# Altium PCB Master.PcbDoc
Units mm, origin at the board's own origin, x right, y up, seen from the top; angles counter-clockwise.
Board outline 105.41 x 114.81 mm, 2 copper layers (Top Layer, Bottom Layer); 24 components, 97 nets, 218 pads, 8 vias.
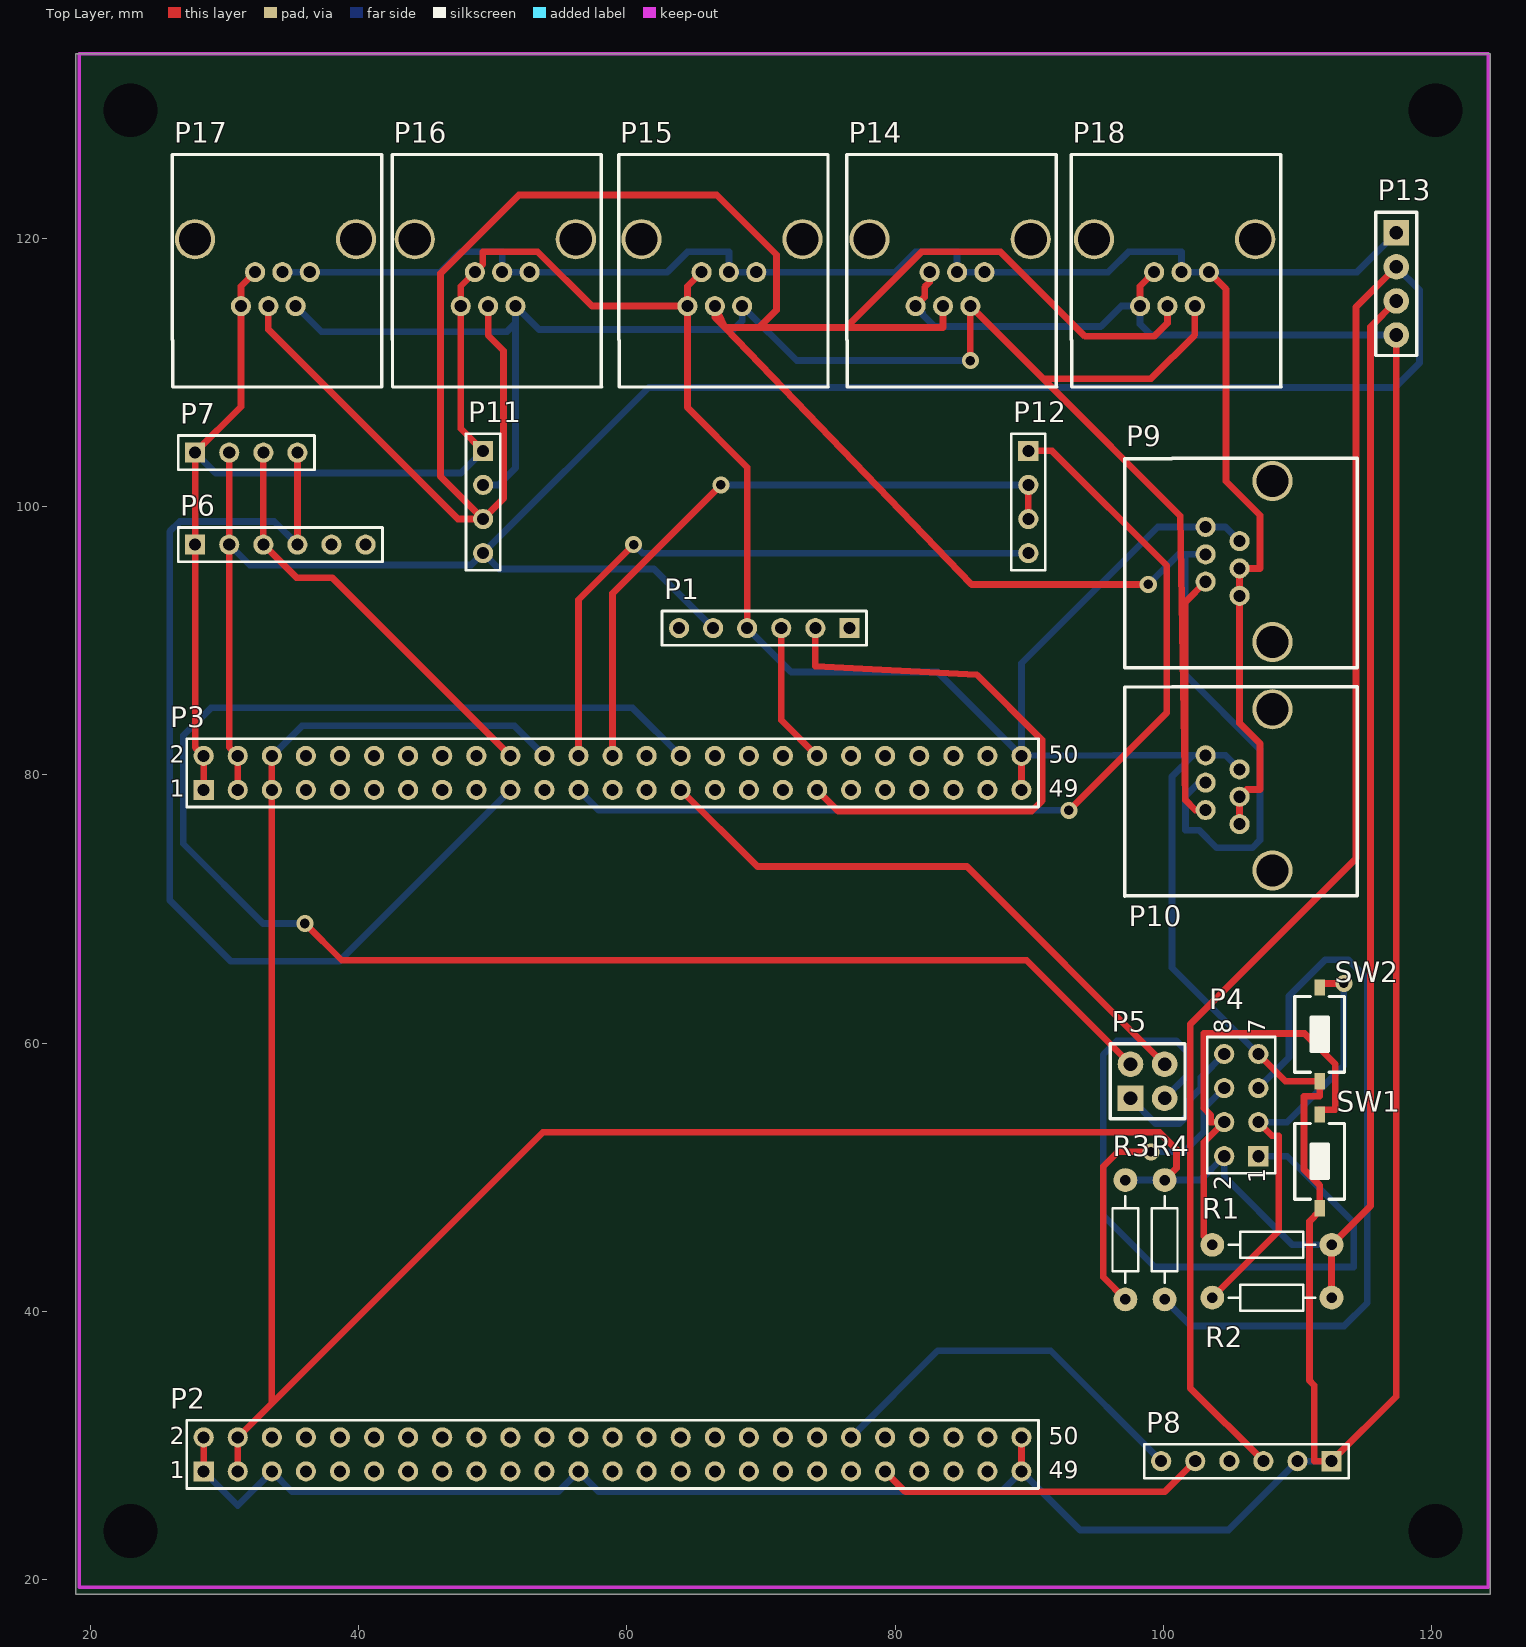
[diagram p0: Top Layer view]
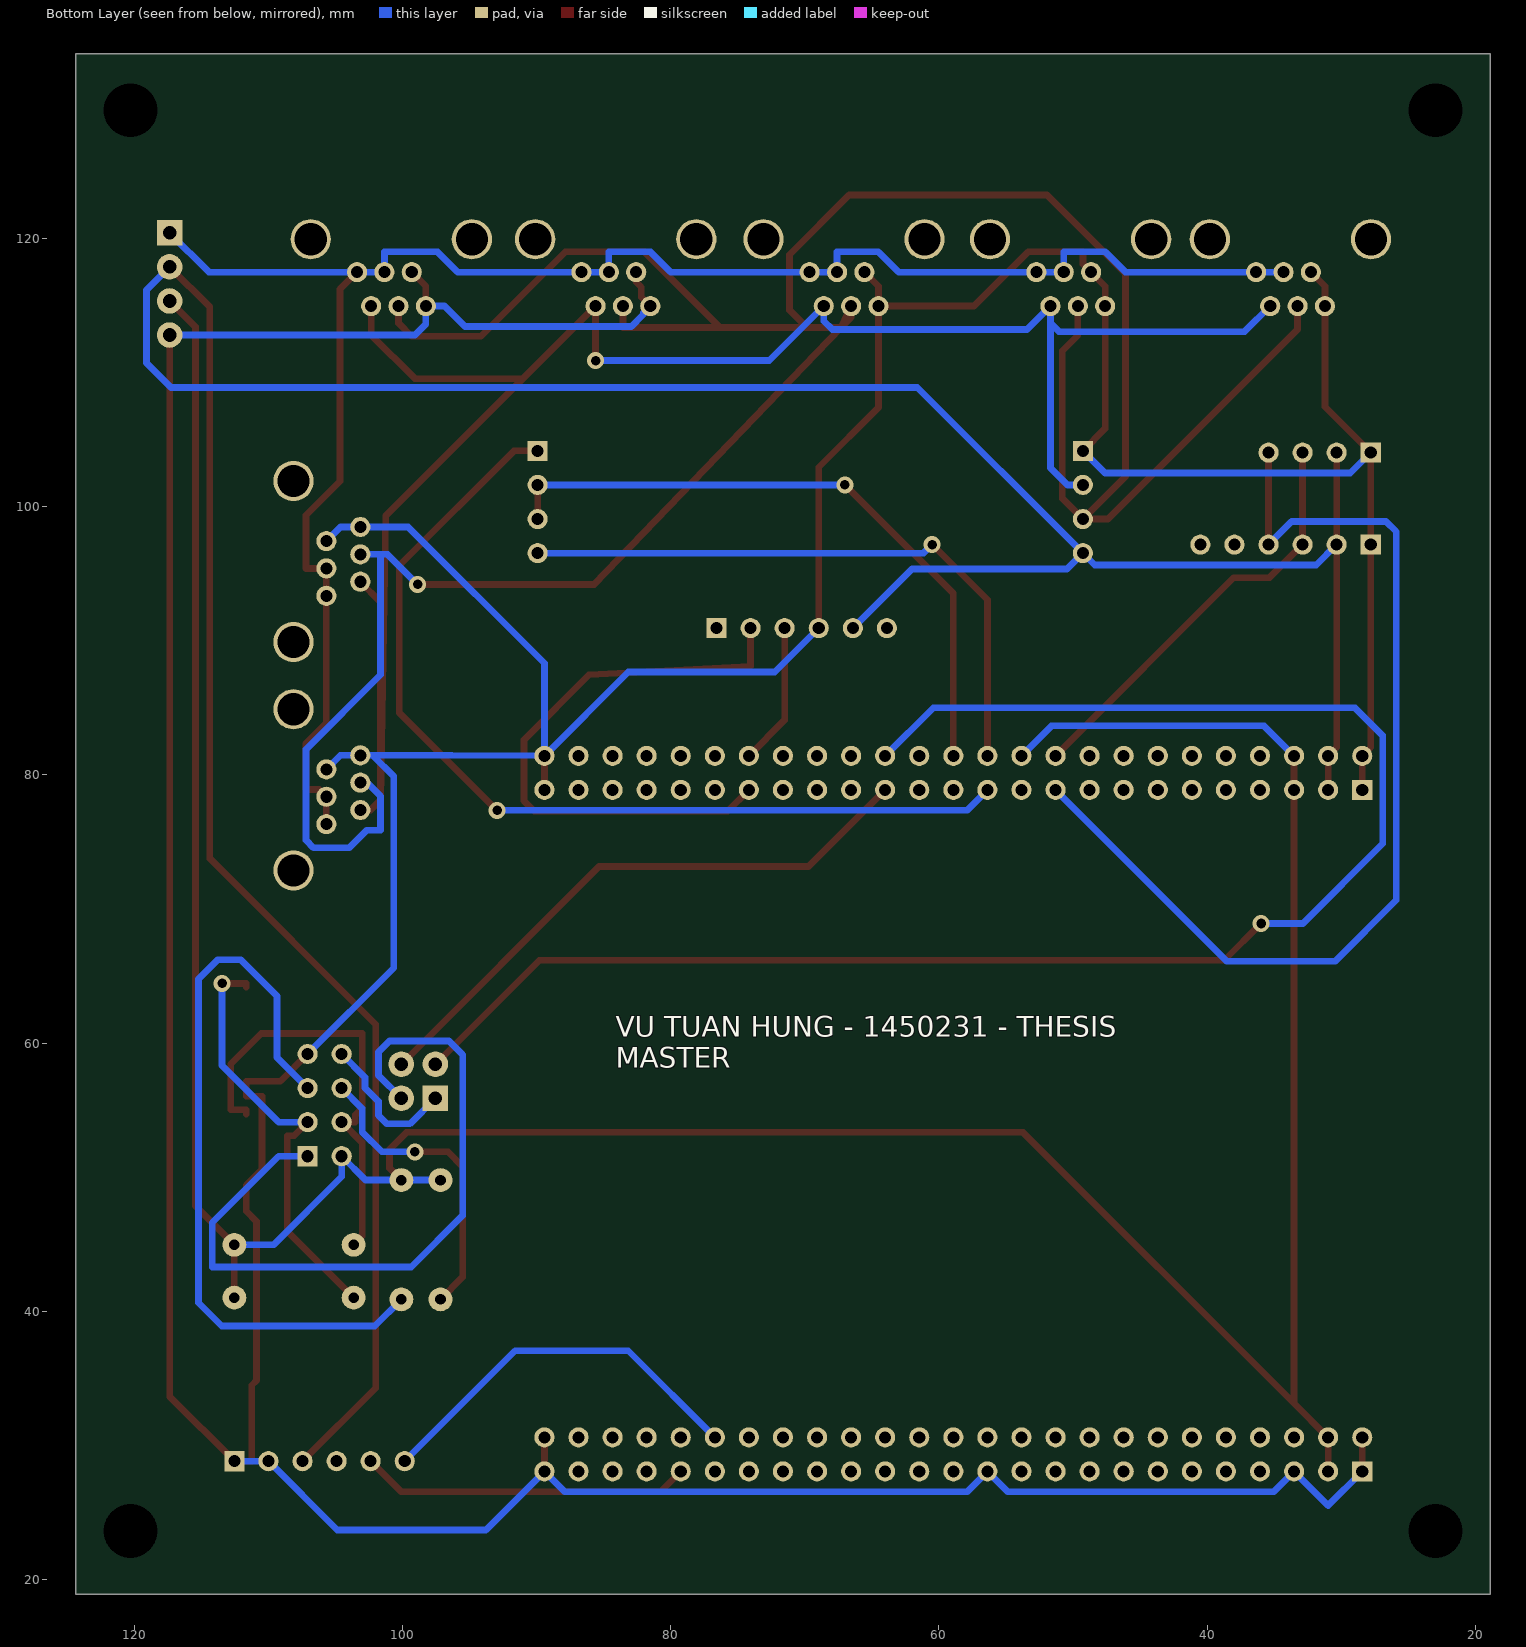
[diagram p1: Bottom Layer view, seen from below]
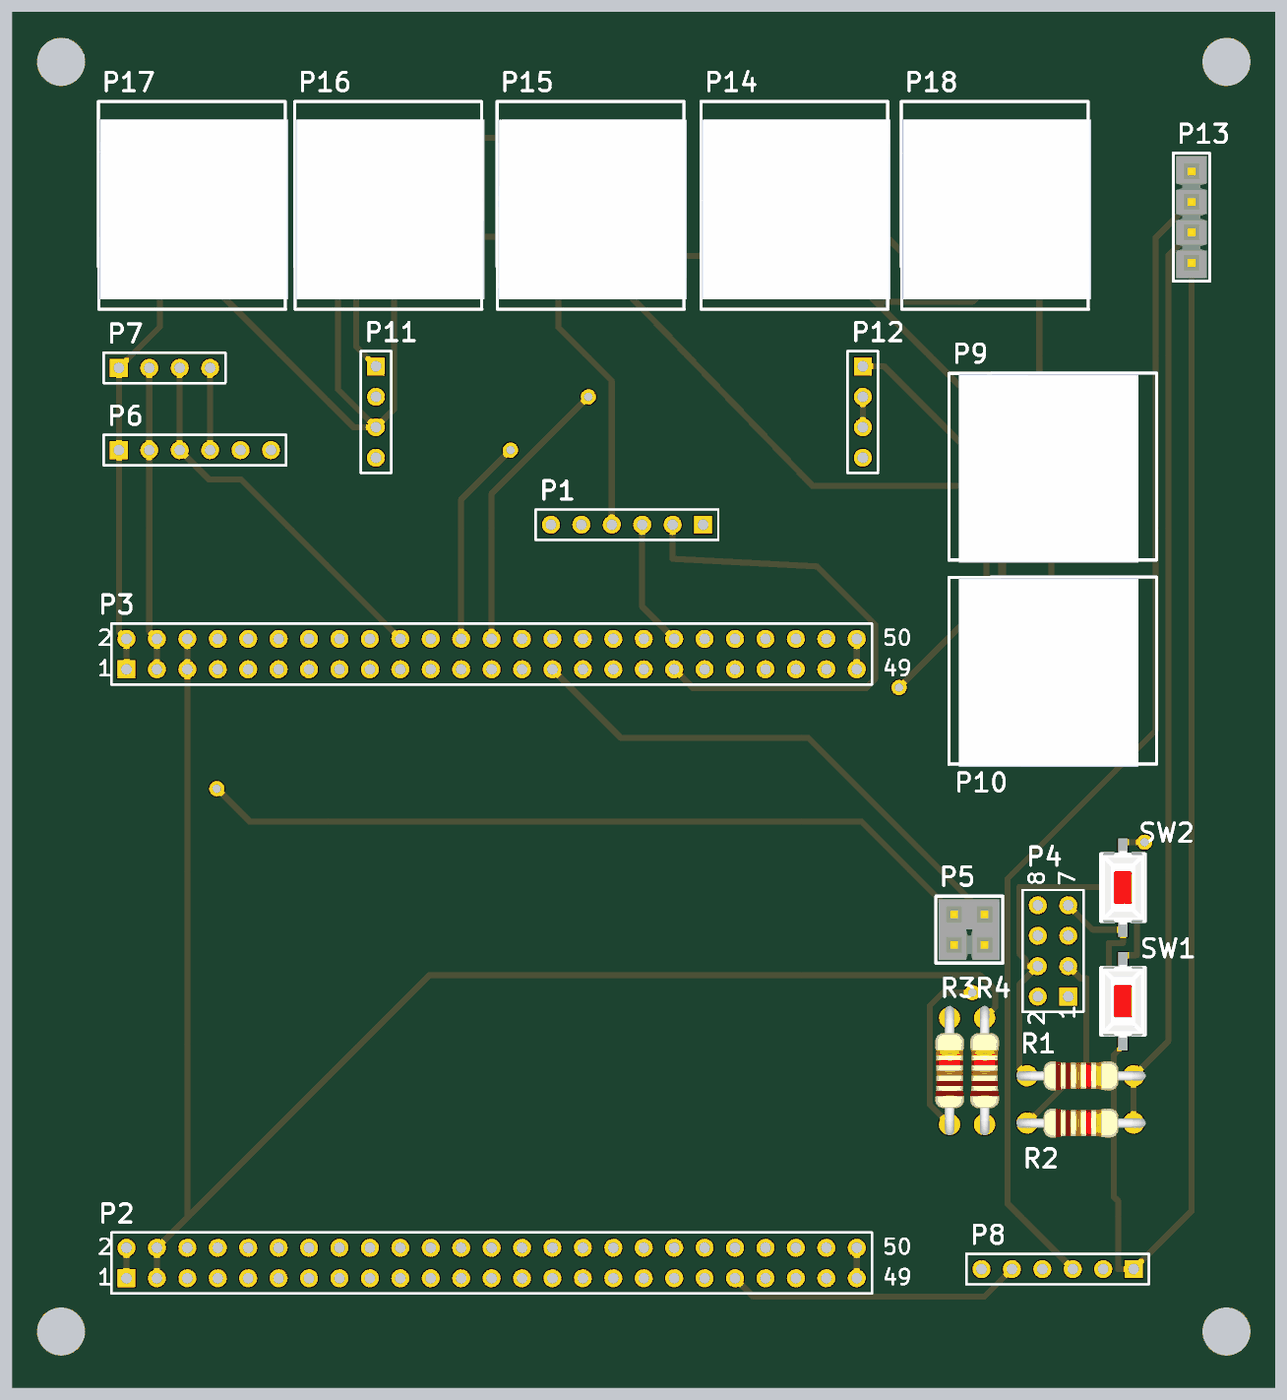
[diagram p2: 3D render of the assembled board from above, using the file's embedded part models]

## Layer stack, top to bottom
Top Solder: solder mask 0.0102, Solder Resist, Dk 3.5
Top Layer: signal copper 0.0356
Dielectric 1: dielectric 0.32, FR-4, Dk 4.8
Bottom Layer: signal copper 0.0356
Bottom Solder: solder mask 0.0102, Solder Resist, Dk 3.5

## Board outline
18.923,18.923 124.333,18.923 124.333,133.731 18.923,133.731

## Design rules (kind name [scope] priority, off if disabled: settings)
Clearance [All] p1: gap=0.5 ignorepadtopadclearanceinfootprint=FALSE
PolygonConnect [All] p1: connectstyle=Relief reliefconductorwidth=0.5 reliefentries=4 polygonreliefangle="90 Angle" airgapwidth=0.5
RoutingVias [All] p1: holewidth=0.711 width=1.27 viastyle="Through Hole" minholewidth=0.711 minwidth=1.27 maxholewidth=0.711 maxwidth=1.27
SolderMaskExpansion [All] p1: expansion=0.102
Width [All] p1: maxlimit=2 minlimit=0.3 preferedwidth=0.5
30 further rules are at their usual default settings.

## Components (designator, comment, footprint, x,y, rotation, side; value= is the part's Value field where it differs from the comment)
P1 "Header 6" HDR1X6 76.581,90.932 r180 top
P2 "Header 25X2" HDR2X25 28.448,28.067 r0 top
P3 "Header 25X2" HDR2X25 28.448,78.867 r0 top
P4 "Header 4X2" HDR2X4 107.061,51.562 r90 top
P5 "Header 2x2" "Header 2x2" 97.536,55.88 r0 top
P6 "Header 6" HDR1X6 27.813,97.155 r0 top
P7 "Header 4" HDR1X4 27.813,104.013 r0 top
P8 "Header 6" HDR1X6 112.522,28.829 r180 top
P9 "Header 8" RJ11 103.134,94.387 r90 top
P10 "Header 8" RJ11 103.134,77.369 r90 top
P11 "Header 4" HDR1X4 49.276,104.14 r270 top
P12 "Header 4" HDR1X4 89.916,104.14 r270 top
P13 "Header 4" "Header 4" 117.348,120.396 r270 top
P14 "Header 8" RJ11 85.598,114.935 r180 top
P15 "Header 8" RJ11 68.588,114.935 r180 top
P16 "Header 8" RJ11 51.689,114.935 r180 top
P17 "Header 8" RJ11 35.306,114.935 r180 top
P18 "Header 8" RJ11 102.328,114.935 r180 top
R1 "RES_SMD_0805" R1/4W 112.522,44.958 r180 top value=10k
R2 "RES_SMD_0805" R1/4W 112.522,41.021 r180 top value=10k
R3 "RES_SMD_0805" R1/4W 97.155,49.784 r270 top value=10k
R4 "RES_SMD_0805" R1/4W 100.076,49.784 r270 top value=10k
SW1 "SW" SW-SMD 111.633,51.181 r270 top value="SW chip 2 pin"
SW2 "SW" SW-SMD 111.633,60.65 r270 top value="SW chip 2 pin"

## Footprints (in the part's own frame and the unit in brackets; to place one, negate y for a bottom-side part, rotate by r counter-clockwise, add the part's x,y. Pads: shape width x height; smd on the part's side, far side on the other; paste and mask are expansions set on the pad)
HDR1X4 [mm] "Connector; Header; 4 Position"
  rect 1.5x1.5 hole 0.9: 1(0,0)
  round 1.5 hole 0.9: 2(2.54,0) 3(5.08,0) 4(7.62,0)
  silkscreen extent -1.27,-1.27 8.89,1.27
HDR1X6 [mm] "Connector; Header; 6 Position"
  rect 1.5x1.5 hole 0.9: 1(0,0)
  round 1.5 hole 0.9: 2(2.54,0) 3(5.08,0) 4(7.62,0) 5(10.16,0) 6(12.7,0)
  silkscreen extent -1.27,-1.27 13.97,1.27
HDR2X4 [mm] "Connector; Header; 4x2 Position"
  rect 1.5x1.5 hole 0.9: 1(0,0)
  round 1.5 hole 0.9: 2(0,2.54) 3(2.54,0) 4(2.54,2.54) 5(5.08,0) 6(5.08,2.54) 7(7.62,0) 8(7.62,2.54)
  silkscreen extent -1.27,-1.27 8.89,3.81
HDR2X25 [mm] "Connector; Header; 25x2 Position"
  rect 1.5x1.5 hole 0.9: 1(0,0)
  round 1.5 hole 0.9: 2(0,2.54) 3(2.54,0) 4(2.54,2.54) 5(5.08,0) 6(5.08,2.54) 7(7.62,0) 8(7.62,2.54) 9(10.16,0) 10(10.16,2.54) 11(12.7,0) 12(12.7,2.54) 13(15.24,0) 14(15.24,2.54) 15(17.78,0) 16(17.78,2.54) 17(20.32,0) 18(20.32,2.54) 19(22.86,0) 20(22.86,2.54) 21(25.4,0) 22(25.4,2.54) 23(27.94,0) 24(27.94,2.54) 25(30.48,0) 26(30.48,2.54) 27(33.02,0) 28(33.02,2.54) 29(35.56,0) 30(35.56,2.54) 31(38.1,0) 32(38.1,2.54) 33(40.64,0) 34(40.64,2.54) 35(43.18,0) 36(43.18,2.54) 37(45.72,0) 38(45.72,2.54) 39(48.26,0) 40(48.26,2.54) 41(50.8,0) 42(50.8,2.54) 43(53.34,0) 44(53.34,2.54) 45(55.88,0) 46(55.88,2.54) 47(58.42,0) 48(58.42,2.54) 49(60.96,0) 50(60.96,2.54)
  silkscreen extent -1.27,-1.27 62.23,3.81
"Header 2x2" [mil] "Connector; Header; 4 Position; 2 Row; Solder Pad 35mil"
  rect 75x75 hole 40: 1(0,0)
  round 75 hole 40: 2(0,100) 3(100,0) 4(100,100)
  silkscreen extent -60,-60 160,160, body extent -50,-50 150,150, height 330
"Header 4" [mil] "Connector; Header; 4 Position; Solder Pad 35mil"
  rect 75x75 hole 40: 1(0,0)
  round 75 hole 40: 2(100,0) 3(200,0) 4(300,0)
  silkscreen extent -60,-60 360,60, body extent -50,-50 350,50, height 330
R1/4W [mil] "R 1/4W, 2 Pin, 350mil"
  round 70 hole 31: 1(0,0) 2(350,0)
  silkscreen extent 48,-38 302,38, body extent -40,-47 386,47, height 111
RJ11 [mm] "DIP 20, 20 PIN, W 300mil, Pin to pin 100mil"
  round 1.5 hole 0.9: 1(0,0) 2(2.04,0) 3(4.08,0) 4(-1.05,-2.53) 5(0.99,-2.53) 6(3.03,-2.53)
  round 3 hole 2.4: 7(-4.5,-4.98) 8(7.51,-4.98)
  silkscreen extent -6.43,-11.3 9.2,6.03, body extent -6.71,-9.8 9.11,5.19, height 12.87
SW-SMD [mm] "Switch SMD type"
  rect 1.2x0.8 smd: 1(-3.5,0) 2(3.5,0)
  silkscreen extent -2.82,-1.85 2.82,1.85, body extent -3.05,-1.85 3.05,1.85, height 2.5

## Part data
P1 P6 P8: "Header, 6-Pin", LatestRevisionDate=17-Jul-2002, LatestRevisionNote="Re-released for DXP Platform.", Publisher="Altium Limited"
P2 P3: "Header, 25-Pin, Dual row", LatestRevisionDate=17-Jul-2002, LatestRevisionNote="Re-released for DXP Platform.", Publisher="Altium Limited"
P4: "Header, 4-Pin, Dual row", LatestRevisionDate=17-Jul-2002, LatestRevisionNote="Re-released for DXP Platform.", Publisher="Altium Limited"
P5: "Header, 4-Pin, 2-Row", LatestRevisionDate=17-Jul-2002, LatestRevisionNote="Re-released for DXP Platform.", Publisher="Altium Limited"
P7 P11 P12 P13: "Header, 4-Pin", LatestRevisionDate=17-Jul-2002, LatestRevisionNote="Re-released for DXP Platform.", Publisher="Altium Limited"
P9 P10 P14 P15 P16 P17 P18: "Header, 8-Pin", LatestRevisionDate=17-Jul-2002, LatestRevisionNote="Re-released for DXP Platform.", Publisher="Altium Limited"
R1 R2 R3 R4: "RES_0805", LatestRevisionDate=17-Jul-2002, LatestRevisionNote="Re-released for DXP Platform.", PackageReference=AXIAL-0.4, Published=8-Jun-2000, Publisher="Altium Limited"
SW1 SW2: library part SW2, "Switch button 2 pin"

## Free pads (board coordinates)
  round 1.524 hole 4: 9(120.269,129.54) 10(22.987,129.54) 11(22.987,23.622) 12(120.269,23.622)

## Via types
v1: diameter 1.27, hole 0.711, Top Layer to Bottom Layer, 8 vias

## Nets (pads, with @x,y where several pads share a name; then routed paths per layer and width w, separated by ;. In a path a pad name is that pad's centre, name@x,y a point inside that pad or via, vN(x,y) a via of type N, cw(c..) or ccw(c..) an arc to the next point about the centre after c; other vN are vias at no path point)
3V3: P2.3 P2.4 P3.5 P3.6 P3.22 P4.2 P13.3 R1.1 R2.1 R3.1 R4.1 | length 251.6
  Top Layer w0.5: P2.3 P2.4 33.528,33.147 ; P3.6 P3.5 33.528,33.147 ; R4.1 100.965,50.673 100.965,52.07 99.695,53.34 53.721,53.34 33.528,33.147 ; R2.1 R1.1 115.418,47.854 115.418,113.386 P13.3
  Bottom Layer w0.5: P3.6 35.763,83.642 51.613,83.642 P3.22 ; R3.1 R4.1 102.743,49.784 P4.2 104.521,50.038 109.601,44.958 R1.1
5V: P1.5 P3.3 P3.4 P6.2 P7.2 P8.3 P11.4 P13.2 | length 246
  Top Layer w0.5: P7.2 P6.2 30.353,82.042 P3.4 P3.3 ; P8.3 101.981,34.29 101.981,61.392 114.351,73.762 114.351,114.859 P13.2
  Bottom Layer w0.5: P6.2 31.877,95.631 48.387,95.631 P11.4 ; P1.5 62.013,95.34 50.456,95.34 P11.4 ; P13.2 119.075,116.129 119.075,110.693 117.246,108.864 61.62,108.864 P11.4
12V: P9.4 P9.5 P10.4 P10.5 P13.1 P14.4 P14.5 P15.4 P15.5 P16.4 P16.5 P17.4 P17.5 P18.4 P18.5 | length 138.9
  Top Layer w0.5: P18.4 104.648,116.195 104.648,101.879 107.188,99.339 107.188,95.377 P9.5 P9.4 105.664,83.845 107.188,82.321 107.188,78.892 106.197,78.892 P10.5 P10.4
  Bottom Layer w0.5: P17.5 P17.4 46.091,117.465 47.6,118.974 50.699,118.974 P16.5 P16.4 63.007,117.465 64.516,118.974 67.598,118.974 P15.5 P15.4 80,117.465 81.509,118.974 84.608,118.974 P14.5 P14.4 95.875,117.465 97.384,118.974 101.338,118.974 P18.5 P18.4 114.417,117.465 P13.1
32K: P6.6
A: P9.1 P10.1 P11.2 P14.1 P15.1 P16.1 P17.1 P18.1 | length 151
  Top Layer w0.5: v1(85.598,110.871) P14.1 91.008,109.525 ; P18.1 102.328,112.793 99.06,109.525 91.008,109.525 ; P10.1 102.361,77.369 101.625,78.105 ; P9.1 101.625,92.878 101.625,78.105 ; 91.008,109.525 101.242,99.291 101.625,78.105
  Bottom Layer w0.5: P17.1 37.211,113.03 51.054,113.03 51.689,113.665 ; P11.2 50.419,101.6 51.689,102.87 51.689,113.665 ; v1(85.598,110.871) 72.652,110.871 P15.1 68.588,113.824 67.945,113.181 53.443,113.181 P16.1 51.689,113.665
B: P9.2 P10.2 P11.3 P14.2 P15.2 P16.2 P17.2 P18.2 | length 226.9
  Top Layer w0.5: P17.2 33.266,113.19 47.396,99.06 P11.3 ; P16.2 49.649,112.759 50.8,111.608 50.8,100.584 P11.3 ; P14.2 83.558,113.335 76.316,113.335 ; v1(98.857,94.183) 85.7,94.183 67.31,113.335 ; P18.2 100.288,113.665 99.297,112.674 94.157,112.674 87.857,118.974 81.955,118.974 76.316,113.335 ; P11.3 46.101,102.235 46.101,117.373 51.943,123.215 66.694,123.215 71.145,118.764 71.145,114.63 69.85,113.335 ; 67.31,113.335 69.85,113.335 ; 67.31,113.335 P15.2 66.548,114.097 67.31,113.335 ; 69.85,113.335 76.316,113.335
  Bottom Layer w0.5: v1(98.857,94.183) 101.101,96.427 101.625,96.427 ; P10.2 102.641,79.409 101.634,78.402 101.634,75.87 102.641,75.87 103.962,74.549 106.612,74.549 107.188,75.125 107.188,81.89 101.625,87.452 101.625,96.427 ; P9.2 101.625,96.427
BOOT0: P3.21
CH_PD: P4.6 R3.2 | length 23.1
  Top Layer w0.5: R3.2 95.504,42.545 95.504,50.8 96.596,51.892 v1(99.06,51.892)
  Bottom Layer w0.5: v1(99.06,51.892) 101.524,51.892 102.997,53.365 102.997,55.118 P4.6
GND: P1.4 P2.1 P2.2 P2.5 P2.23 P2.49 P2.50 P3.1 P3.2 P3.49 P3.50 P4.7 P6.1 P7.1 P8.1 P8.2 P9.3 P9.6 P10.3 P10.6 P11.1 P13.4 P14.3 P14.6 P15.3 P15.6 P16.3 P16.6 P17.3 P17.6 P18.3 P18.6 SW1.2 SW2.2 | length 488
  Top Layer w0.5: P2.1 P2.2 ; P3.1 P3.2 27.813,82.042 P6.1 P7.1 31.226,107.426 P17.3 31.226,116.415 P17.6 ; P11.1 47.609,105.807 P16.3 47.609,116.415 P16.6 49.255,118.061 49.255,118.974 53.352,118.974 57.39,114.935 P15.3 ; P15.6 64.508,116.415 P15.3 ; P1.4 68.961,102.921 64.508,107.374 P15.3 ; P14.3 82.188,115.605 82.188,116.342 82.568,116.722 P14.6 ; P2.49 P2.50 ; P3.49 P3.50 ; P18.3 98.248,116.415 P18.6 ; P4.7 109.093,57.15 SW2.2 111.633,56.032 110.465,56.032 110.465,50.571 111.633,49.403 SW1.2 111.633,47.473 110.871,46.711 110.871,34.849 111.227,34.493 111.227,28.829 P8.1 117.348,33.655 P13.4
  Bottom Layer w0.5: P7.1 29.337,102.489 47.625,102.489 P11.1 ; P2.1 30.988,25.527 P2.5 35.052,26.543 54.864,26.543 P2.23 57.912,26.543 87.884,26.543 P2.49 93.777,23.698 104.851,23.698 P8.2 P8.1 ; P1.4 72.238,87.655 83.16,87.655 P3.50 ; P14.3 82.042,114.411 82.042,114.3 82.931,113.411 95.326,113.411 96.85,114.935 P18.3 98.248,113.588 99.06,112.776 P13.4 ; P10.6 104.614,81.449 P10.3 102.214,81.449 ; P9.6 104.614,98.467 P9.3 99.568,98.467 89.408,88.307 P3.50 ; P4.7 100.634,65.609 100.634,79.869 102.214,81.449 ; P3.50 96.308,81.449 102.214,81.449
IO_0: P4.3 R2.2 SW2.1 | length 32.4
  Top Layer w0.5: R2.2 108.585,45.974 108.585,53.086 108.077,53.086 P4.3 ; SW2.1 111.633,64.44 v1(113.436,64.44)
  Bottom Layer w0.5: P4.3 109.22,54.102 113.436,58.318 v1(113.436,64.44)
IO_2: P4.5 R4.2 | length 56.2
  Bottom Layer w0.5: R4.2 102.057,38.913 113.462,38.913 115.189,40.64 115.189,64.77 113.741,66.218 112.065,66.218 109.347,63.5 109.347,58.928 P4.5
NC: P2.48
NRST: P2.6
PA0: P2.12
PA1: P2.11
PA2: P2.14
PA3: P2.13
PA4: P2.16
PA5: P2.15
PA6: P2.18
PA7: P2.17
PA8: P3.43
PA9: P3.44
PA10: P3.41
PA13: P3.42
PA14: P3.39
PA15: P3.40
PB0: P2.22
PB1: P2.21
PB2: P2.24
PB3: P3.28
PB4: P3.25
PB5: P3.26 P12.2 P12.3 | length 49
  Top Layer w0.5: P3.26 58.928,93.523 v1(67.005,101.6) ; P12.3 P12.2
  Bottom Layer w0.5: v1(67.005,101.6) P12.2
PB6: P3.23 P12.1 | length 72.3
  Top Layer w0.5: P12.1 91.682,104.14 100.242,95.58 100.242,84.646 v1(92.939,77.343)
  Bottom Layer w0.5: P3.23 57.912,77.343 v1(92.939,77.343)
PB7: P3.24 P12.4 | length 47.1
  Top Layer w0.5: P3.24 56.388,93.04 v1(60.503,97.155)
  Bottom Layer w0.5: v1(60.503,97.155) 61.138,96.52 P12.4
PB8: P3.19 P6.4 P7.4 | length 77.5
  Top Layer w0.5: P6.4 P7.4
  Bottom Layer w0.5: P6.4 33.706,98.882 26.67,98.882 25.908,98.12 25.908,70.663 30.48,66.091 38.532,66.091 P3.19
PB9: P3.20 P6.3 P7.3 | length 31.8
  Top Layer w0.5: P7.3 P6.3 35.357,94.691 38.024,94.691 P3.20
PB10: P2.34
PB11: P2.35
PB12: P2.36
PB13: P2.37
PB14: P2.38
PB15: P2.39
PC0: P2.8
PC1: P2.7
PC2: P2.10
PC3: P2.9
PC4: P2.20
PC5: P2.19
PC6: P3.47
PC7: P3.48
PC8: P3.45
PC9: P3.46
PC10: P1.2 P3.37 | length 44
  Top Layer w0.5: P1.2 74.041,88.087 86.081,87.452 90.932,82.601 90.932,78.054 90.17,77.292 75.743,77.292 P3.37
PC11: P1.3 P3.38 | length 10.6
  Top Layer w0.5: P1.3 71.501,84.074 P3.38
PC12: P3.35
PC13: P3.12
PC14: P3.9
PC15: P3.10
PD0: P3.36
PD1: P3.33
PD2: P3.34
PD3: P3.31
PD4: P3.32
PD5: P3.29 P5.4 | length 44.5
  Top Layer w0.5: P3.29 69.723,73.152 85.344,73.152 P5.4
PD6: P3.30 P5.2 | length 124.9
  Top Layer w0.5: v1(35.992,68.91) 38.735,66.167 89.789,66.167 P5.2
  Bottom Layer w0.5: v1(35.992,68.91) 32.868,68.91 26.924,74.854 26.924,82.931 28.981,84.988 60.427,84.988 P3.30
PD7: P3.27
PD8: P2.40 P8.6 | length 29.2
  Bottom Layer w0.5: P2.40 83.16,37.059 91.592,37.059 P8.6
PD9: P2.41 P8.5 | length 24.7
  Top Layer w0.5: P2.41 80.772,26.543 100.076,26.543 P8.5
PD10: P2.42
PD11: P2.43
PD12: P2.44
PD13: P2.45
PD14: P2.46
PD15: P2.47
PE0: P3.17
PE1: P3.18
PE2: P3.15
PE3: P3.16
PE4: P3.13
PE5: P3.14
PE6: P3.11
PE7: P2.25
PE8: P2.26
PE9: P2.27
PE10: P2.28
PE11: P2.29
PE12: P2.30
PE13: P2.31
PE14: P2.32
PE15: P2.33
PH0: P3.7
PH1: P3.8
RESET: P4.4 R1.2 SW1.1 | length 33.5
  Top Layer w0.5: R1.2 102.997,45.593 102.997,52.578 P4.4 103.505,54.102 103.505,54.635 102.997,55.143 102.997,60.706 110.515,60.706 112.801,58.42 112.801,55.016 111.633,55.016 SW1.1
RX: P4.1 P5.3 | length 55.9
  Bottom Layer w0.5: P5.3 101.779,57.583 101.779,59.334 100.965,60.147 96.52,60.147 95.504,59.131 95.504,47.142 99.339,43.307 114.173,43.307 114.173,46.609 109.22,51.562 P4.1
SQW: P6.5
TX: P4.8 P5.1 | length 11
  Bottom Layer w0.5: P5.1 99.441,53.975 101.143,53.975 101.778,54.61 101.778,55.651 102.779,56.652 102.779,57.44 P4.8
pads on no net: P1.1 P1.6 P8.4 P9.7 P9.8 P10.7 P10.8 P14.7 P14.8 P15.7 P15.8 P16.7 P16.8 P17.7 P17.8 P18.7 P18.8

## Keep-outs
Top Layer:
  lines w0.254: 19.177,19.431 112.649,19.431 124.206,19.431 124.206,109.474 124.206,133.731 19.177,133.731 19.177,19.431

## Silkscreen, mask and mechanical layers (free items; w line width, h text height)
Bottom Overlay:
  text "VU TUAN HUNG - 1450231 - THESIS / MASTER" at 84.074,58.166 h1.52

## Text inside footprints (layer, text, board x,y; h text height)
P2: Top Overlay "50" at 91.44,30.099 h1.27; Top Overlay "49" at 91.44,27.559 h1.27; Top Overlay "1" at 25.908,27.559 h1.27; Top Overlay "2" at 25.908,30.099 h1.27
P3: Top Overlay "50" at 91.44,80.899 h1.27; Top Overlay "49" at 91.44,78.359 h1.27; Top Overlay "1" at 25.908,78.359 h1.27; Top Overlay "2" at 25.908,80.899 h1.27
P4: Top Overlay "8" at 105.029,60.706 h1.27 r90; Top Overlay "7" at 107.569,60.706 h1.27 r90; Top Overlay "1" at 107.569,49.53 h1.27 r90; Top Overlay "2" at 105.029,49.022 h1.27 r90